# Altium PCB RGB_PCB.PcbDoc
Units mm, origin at the board's own origin, x right, y up, seen from the top; angles counter-clockwise.
Board outline 46.35 x 43.18 mm, 2 copper layers (Top Layer, Bottom Layer); 21 components, 12 nets, 104 pads, 13 vias.
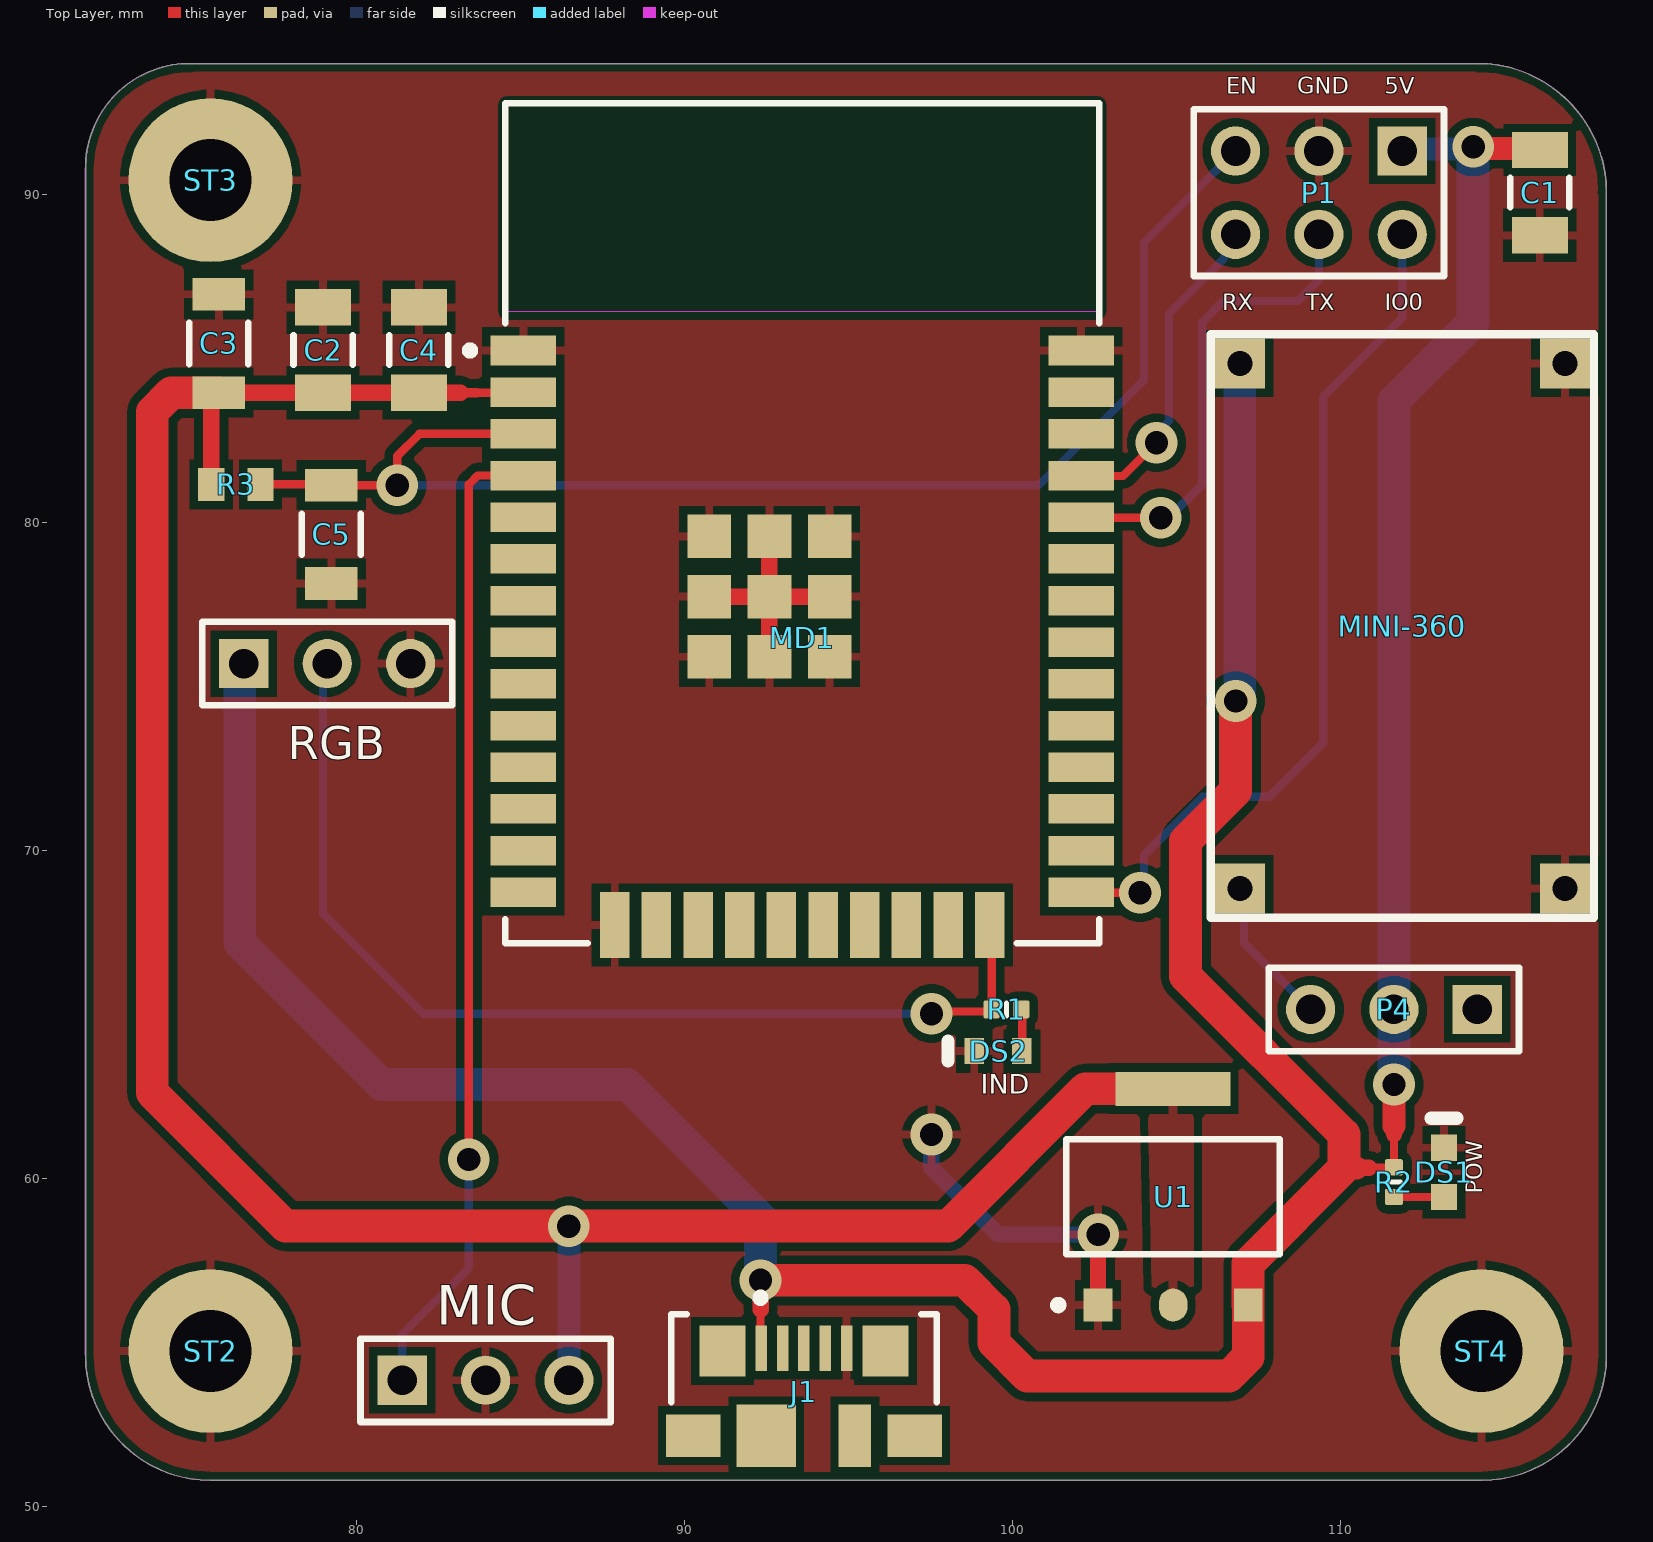
[diagram p0: Top Layer view]
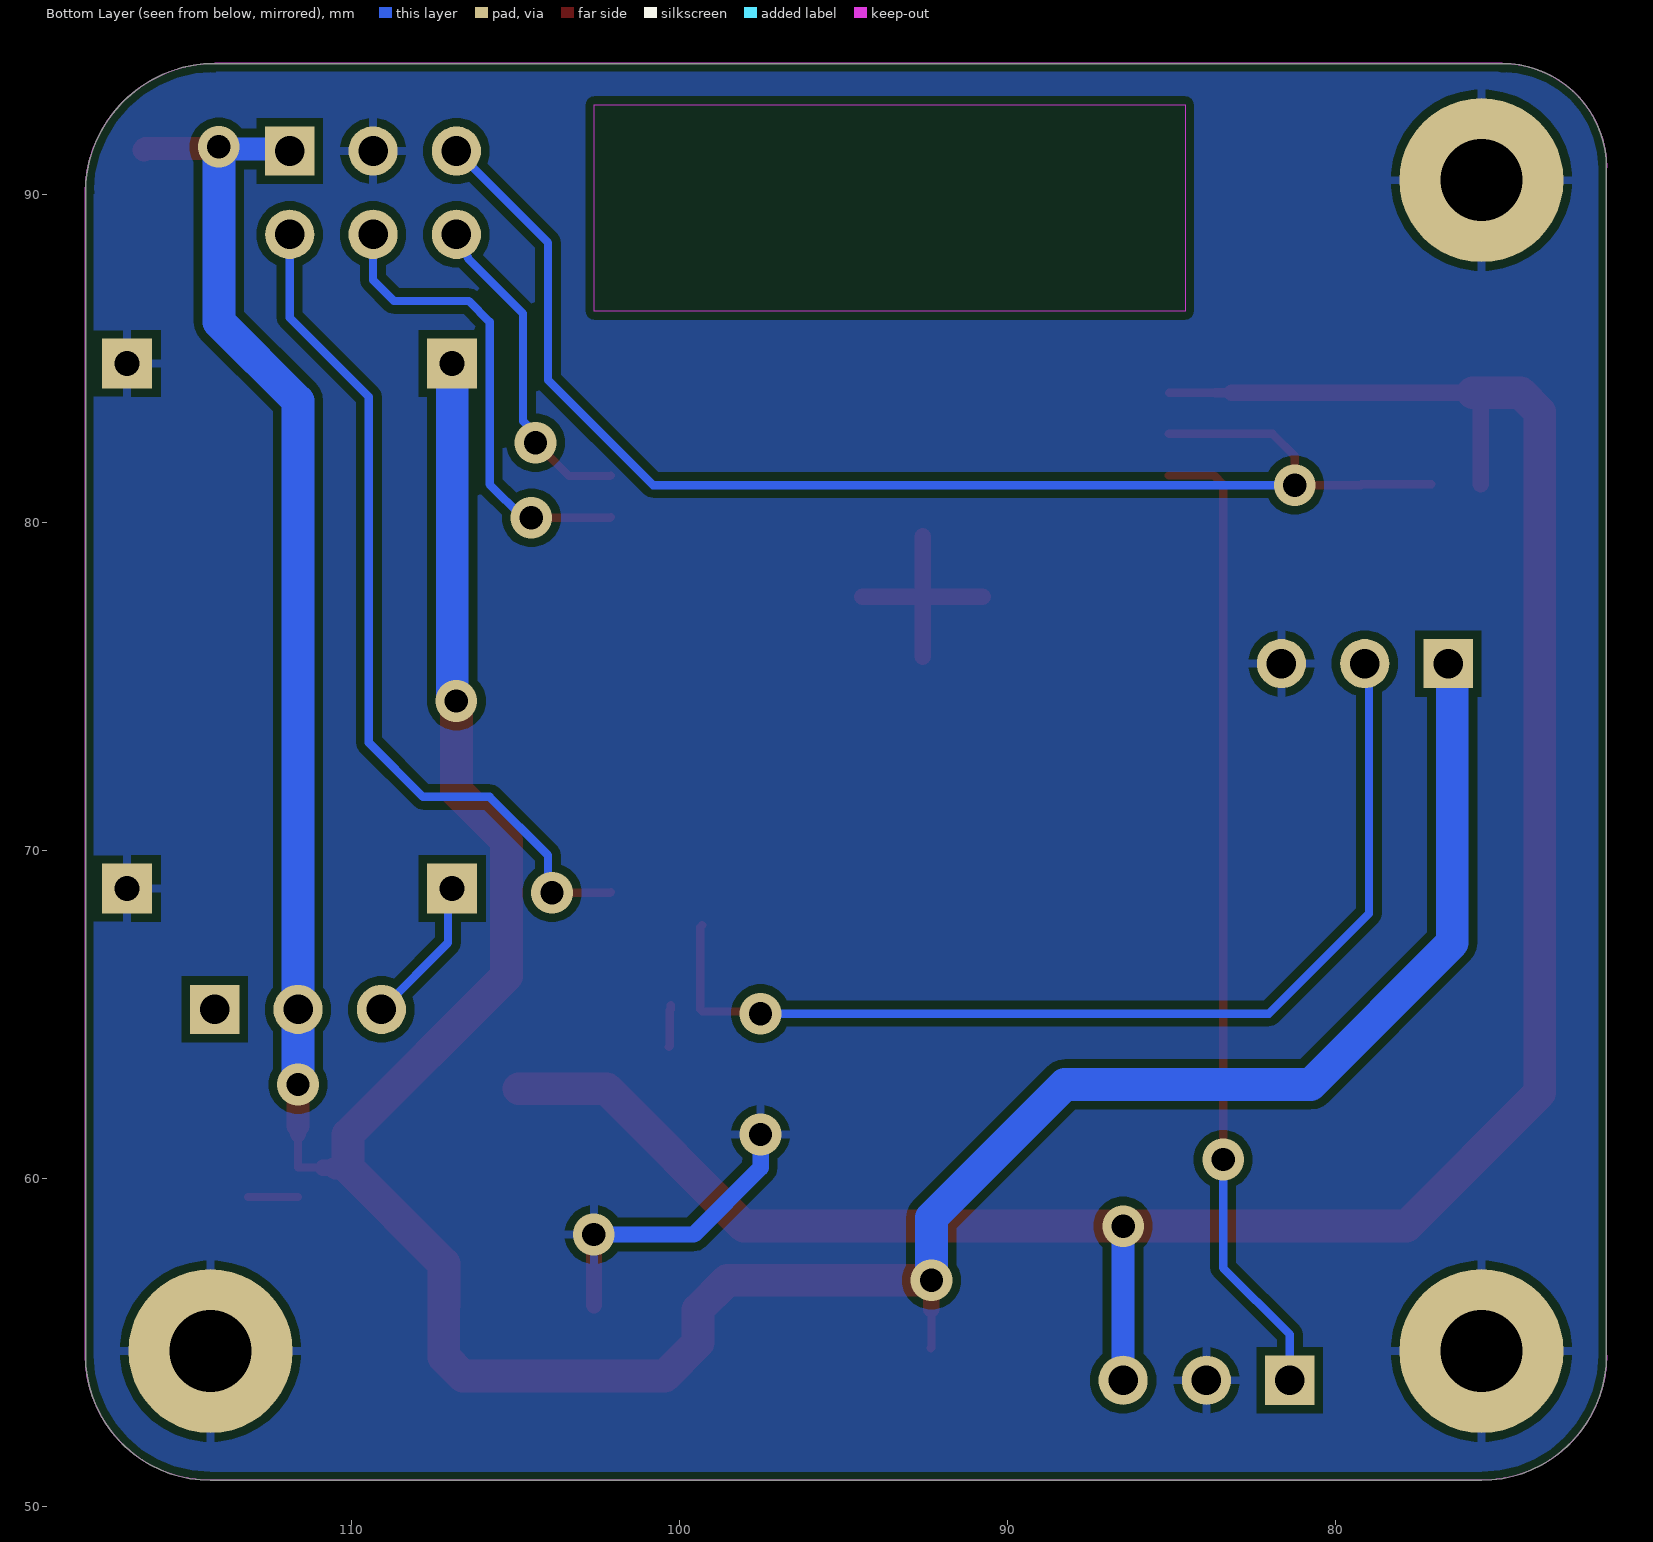
[diagram p1: Bottom Layer view, seen from below]
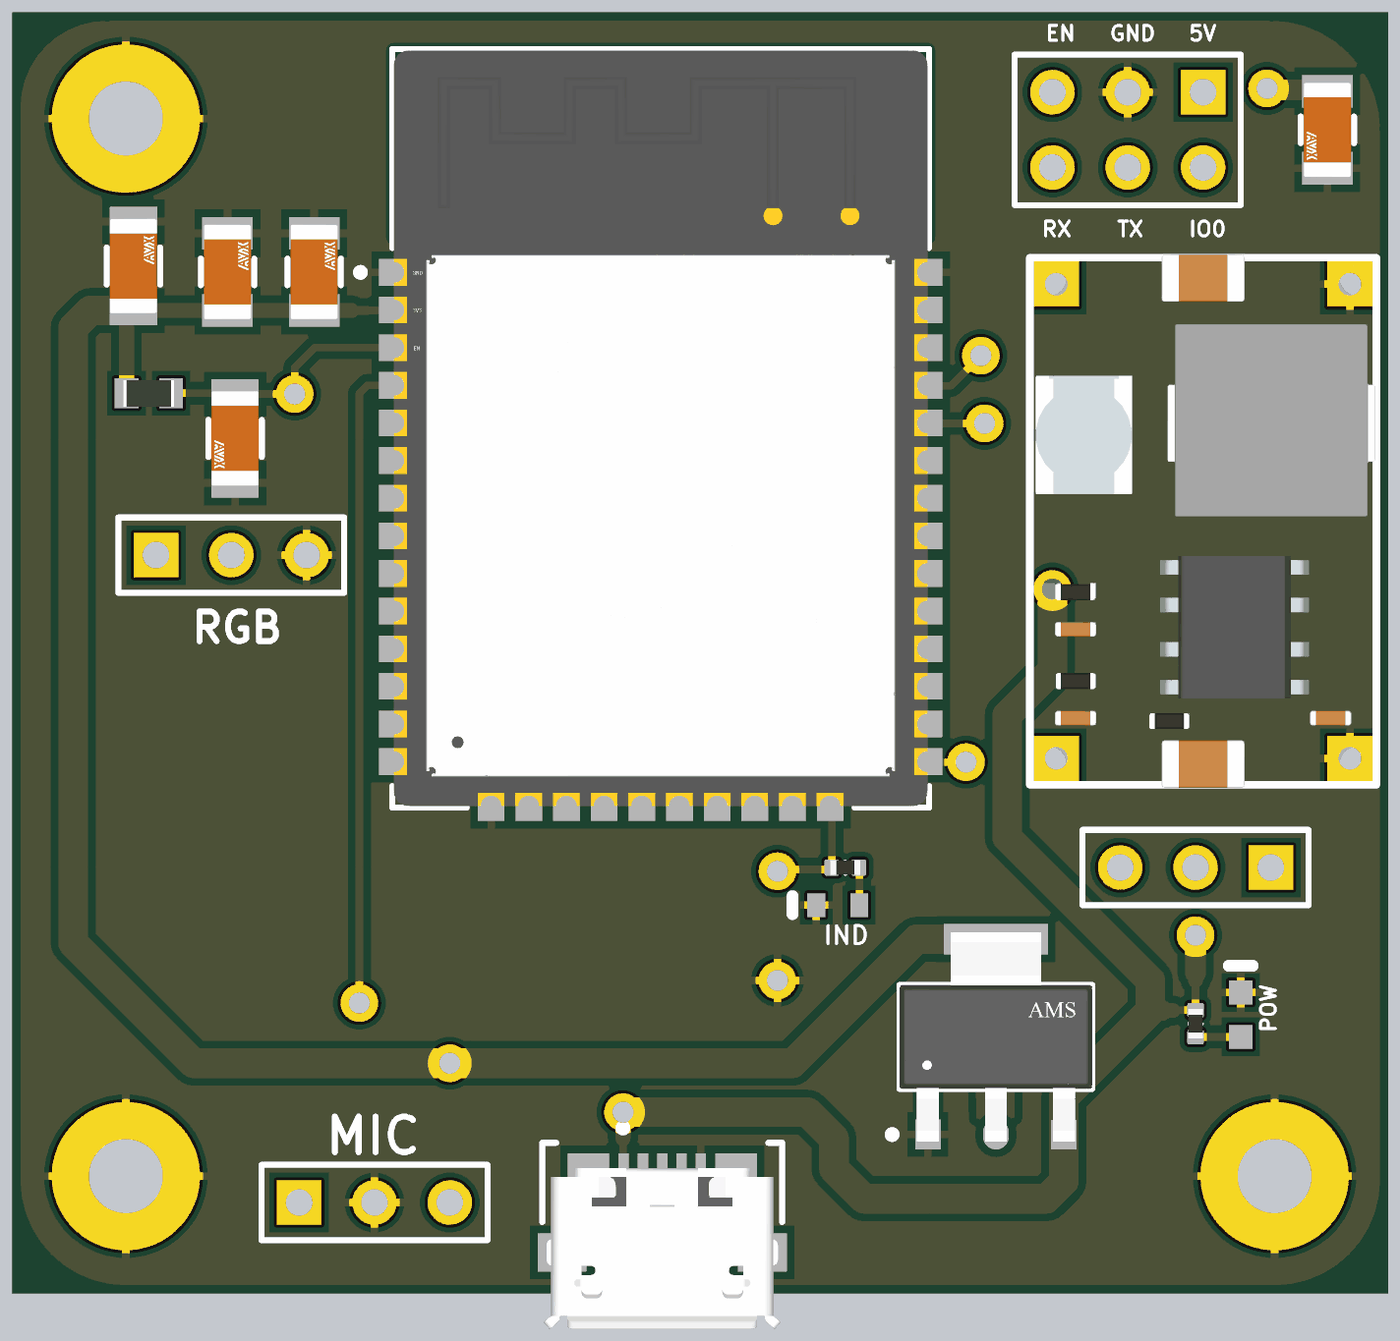
[diagram p2: 3D render of the assembled board from above, using the file's embedded part models]

## Layer stack, top to bottom
Top Solder: solder mask 0.0102, Solder Resist, Dk 3.5
Top Layer: signal copper 0.0356
Dielectric 1: dielectric 0.32, FR-4, Dk 4.8
Bottom Layer: signal copper 0.0356
Bottom Solder: solder mask 0.0102, Solder Resist, Dk 3.5

## Board outline
71.755,90.805 cw(c74.93,90.805) 74.93,93.98 114.173,93.98 cw(c114.173,90.043) 118.11,90.043 118.11,54.61 cw(c114.3,54.61) 114.3,50.8 75.565,50.8 cw(c75.565,54.61) 71.755,54.61

## Design rules (kind name [scope] priority, off if disabled: settings)
Clearance [All] p1: gap=0.254 ignorepadtopadclearanceinfootprint=FALSE except(0: Arc-Hole Track-Hole SMDPad-Hole THPad-Hole Via-Hole Fill-Hole Poly-Hole Region-Hole Text-Hole)
PolygonConnect [All] p1: connectstyle=Relief reliefconductorwidth=0.254 reliefentries=4 polygonreliefangle="90 Angle" airgapwidth=0.254
RoutingVias [All] p1: holewidth=0.711 width=1.27 viastyle="Through Hole" minholewidth=0.711 minwidth=1.27 maxholewidth=0.711 maxwidth=1.27
SolderMaskExpansion [All] p1: expansion=0.102 istentingtop=FALSE
UnRoutedNet [All] p1: checkbadconnections=TRUE
Width [All] p1: maxlimit=1 minlimit=0.254 preferedwidth=0.3 minimp=50.000000 maximp=50.000000 favimp=50.000000
29 further rules are at their usual default settings.

## Components (designator, comment, footprint, x,y, rotation, side; value= is the part's Value field where it differs from the comment)
C1 "22uF" FP-1206-L_3_2_0_2-W_1_6_0-IPC_C 116.078,90.043 r270 top
C2 "22uF" FP-1206-L_3_2_0_2-W_1_6_0-IPC_C 78.994,85.248 r90 top
C3 "100nF" FP-1206-L_3_2_0_2-W_1_6_0-MFG 75.819,85.447 r90 top
C4 "22uF" FP-1206-L_3_2_0_2-W_1_6_0-IPC_C 81.915,85.248 r90 top
C5 "100nF" FP-1206-L_3_2_0_2-W_1_6_0-MFG 79.248,79.629 r270 top
DS1 "LED RED" LTST-C191KRKT_V 113.157,60.186 r90 top
DS2 "LED BLUE" VISH-TLMX1100-2_V 99.568,63.881 r180 top
J1 "473460001" FP-473460001-MFG 93.651,52.512 r0 top
MD1 "ESP32-WROOM-32" FP-ESP32-WROOM-32-MFG 93.599,79.973 r0 top
MIC "MAX4466" HDR1X3 81.407,53.848 r0 top (schematic designator P2)
MINI-360 "MINI-360" MINI-360 110.744,73.533 r90 top
P1 "PROG. HEADER" HDR2X3_CEN 111.887,91.313 r180 top
P4 "SWITCH" HDR1X3 114.173,65.151 r180 top
R1 "Resistor 2K +/-5 % 0402 63 mW" RESC0402(1005)_L 99.822,65.151 r180 top value=2k
R2 "Resistor 2K +/-5 % 0402 63 mW" RESC0402(1005)_L 111.633,59.886 r90 top value=2k
R3 "Resistor 10k +/-1% 0603 100 mW" RESC1608X55X25ML10T15 76.339,81.153 r180 top value=10k
RGB "LIGHTS" HDR1X3 76.581,75.692 r0 top (schematic designator P3)
ST2 "PTH-M2D5X5" PTH-M2D5X5#1 75.565,54.737 r0 top
ST3 "PTH-M2D5X5" PTH-M2D5X5#2 75.692,85.344 r0 top
ST4 "PTH-M2D5X5" PTH-M2D5X5#3 113.919,54.61 r0 top
U1 "AMS1117-3.3" FP-AMS1117-IPC_C 104.902,59.436 r90 top

## Footprints (in the part's own frame and the unit in brackets; to place one, negate y for a bottom-side part, rotate by r counter-clockwise, add the part's x,y. Pads: shape width x height; smd on the part's side, far side on the other; paste and mask are expansions set on the pad)
FP-1206-L_3_2_0_2-W_1_6_0-IPC_C [mm]
  rect 1.105x1.706 smd paste+0 mask+0: 1(-1.301,0) 2(1.301,0)
  silkscreen extent -0.45,-0.9 0.45,0.9, body extent -1.95,-1 1.95,1, height 0.25
FP-1206-L_3_2_0_2-W_1_6_0-MFG [mm]
  rect 1x1.6 smd paste+0 mask+0: 1(-1.5,0) 2(1.5,0)
  silkscreen extent -0.63,-0.9 0.63,0.9, body extent -2.1,-1 2.1,1, height 0.25
FP-473460001-MFG [mm]
  rect 0.35x1.38 smd paste+0 mask+0: 1(-1.3,2.31) 2(-0.65,2.31) 3(0,2.31) 4(0.65,2.31) 5(1.3,2.31)
  rect 1.4x1.55 smd paste+0 mask+0: 6(-2.488,2.225) 7(2.488,2.225)
  rect 1.65x1.3 smd paste+0 mask+0: 8(-3.375,-0.35) 11(3.375,-0.35)
  rect 1.8x1.9 smd paste+0 mask+0: 9(-1.15,-0.35)
  rect 1x1.9 smd paste+0 mask+0: 10(1.55,-0.35)
  silkscreen extent -4.05,0.67 4.05,3.97, body extent -4.3,-2.48 4.3,3.45, height 0.25
FP-AMS1117-IPC_C [mm]
  rect 1.004x0.872 smd paste+0 mask+0: 1(-3.295,2.29)
  rrect100% 1.004x0.872 smd paste+0 mask+0: 2(-3.295,0)
  rect 1x0.872 smd paste+0 mask+0: 3(-3.295,-2.29)
  rect 1.04x3.5 smd paste+0 mask+0: ""(3.295,0)
  silkscreen extent -3.42,-3.25 1.75,3.62, body extent -3.9,-3.35 3.9,3.35, height 0.25
FP-ESP32-WROOM-32-MFG [mm]
  rect 2x0.9 smd paste+0 mask+0: 1(-8.5,5.26) 2(-8.5,3.99) 3(-8.5,2.72) 4(-8.5,1.45) 5(-8.5,0.18) 6(-8.5,-1.09) 7(-8.5,-2.36) 8(-8.5,-3.63) 9(-8.5,-4.9) 10(-8.5,-6.17) 11(-8.5,-7.44) 12(-8.5,-8.71) 13(-8.5,-9.98) 14(-8.5,-11.25) 25(8.5,-11.25) 26(8.5,-9.98) 27(8.5,-8.71) 28(8.5,-7.44) 29(8.5,-6.17) 30(8.5,-4.9) 31(8.5,-3.63) 32(8.5,-2.36) 33(8.5,-1.09) 34(8.5,0.18) 35(8.5,1.45) 36(8.5,2.72) 37(8.5,3.99) 38(8.5,5.26)
  rect 0.9x2 smd paste+0 mask+0: 15(-5.715,-12.25) 16(-4.445,-12.25) 17(-3.175,-12.25) 18(-1.905,-12.25) 19(-0.635,-12.25) 20(0.635,-12.25) 21(1.905,-12.25) 22(3.175,-12.25) 23(4.445,-12.25) 24(5.715,-12.25)
  rect 1.33x1.33 smd paste+0 mask+0: 39(-2.835,-4.075) 39(-2.835,-2.24) 39(-2.835,-0.405) 39(-1,-4.075) 39(-1,-2.24) 39(-1,-0.405) 39(0.835,-4.075) 39(0.835,-2.24) 39(0.835,-0.405)
  Keep-Out Layer region: -9,6.45 9,6.45 9,12.75 -9,12.75
  Keep-Out Layer region: -9,6.45 9,6.45 9,12.75 -9,12.75
  silkscreen extent -10.25,-12.8 9.05,12.8, body extent -9.6,-13.35 9.6,12.9, height 0.25
HDR1X3 [mm] "Connector; Header; 3 Position"
  rect 1.5x1.5 hole 0.9: 1(0,0)
  round 1.5 hole 0.9: 2(2.54,0) 3(5.08,0)
  silkscreen extent -1.27,-1.27 6.35,1.27
HDR2X3_CEN [mm] "Connector; Header; 3x2 Position"
  rect 1.5x1.5 hole 0.9: 1(0,0)
  round 1.5 hole 0.9: 2(2.54,0) 3(5.08,0) 4(0,2.54) 5(2.54,2.54) 6(5.08,2.54)
  silkscreen extent -1.27,-1.27 6.35,3.81
LTST-C191KRKT_V [mm] "SMD, 2-Leads, Body 1.6x0.8mm"
  rect 0.8x0.8 smd: 1(-0.75,0) 2(0.75,0)
  silkscreen extent 1.65,-0.4 1.65,0.4, body extent -0.8,-0.4 0.8,0.4, height 0.9
MINI-360 [mil]
  rect 60x60 hole 30: 1(-185,150) 2(445,150) 3(-185,-240) 4(445,-240)
  silkscreen extent -220,-275 480,185, body extent -224,-281 485,191, height 88
PTH-M2D5X5#1 [mm]
  round 5 hole 2.5: 1(0,0)
PTH-M2D5X5#2 [mm]
  round 5 hole 2.5: 1(-0.127,5.08)
PTH-M2D5X5#3 [mm]
  round 5 hole 2.5: 1(0.381,0.127)
RESC0402(1005)_L [mm] "Chip Resistor, Body 1.0x0.5mm, IPC High Density"
  rrect25% 0.5x0.55 smd: 1(-0.45,0) 2(0.45,0)
  silkscreen extent 0,-0.2 0,0.2, body extent -0.5,-0.25 0.5,0.25, height 0.3
RESC1608X55X25ML10T15 [mm] "Chip Resistor, 2-Leads, Body 1.70x0.90mm, IPC Low Density"
  rect 0.8x1 smd: 1(-0.75,0) 2(0.75,0)
  body extent -0.85,-0.45 0.85,0.45, height 0.55
VISH-TLMX1100-2_V [mm] "SMD, 2-Leads, Body 1.6x0.8mm"
  rect 0.6x0.8 smd: 1(-0.725,0) 2(0.725,0)
  silkscreen extent 1.53,-0.3 1.53,0.3, body extent -0.8,-0.4 0.8,0.4, height 0.65

## Part data
C1 C2 C4: library part CMP-1037-04992-2, "General Purpose Ceramic Capacitor, 1206, 22uF, 10%, X5R, 15%, 16V", Case Code (Imperial)=1206, Case Code (Metric)=3216, Dielectric=X5R, Max Operating Temperature=85°C, Min Operating Temperature=-55°C, Package Quantity=1, Tolerance=10%, Voltage Rating=16V, Capacitance=22uF, Case/Package=1206, Construction=Flat, Contact Plating=Tin, Depth=1.6mm, Height=0.07mm, Lead Free="Lead Free", Length=3.2mm, Mount="Surface Mount", Number of Pins=2, Packaging="Tape and Reel", Radiation Hardening=No, REACH SVHC="No SVHC", RoHS Compliant=Yes, Series=-, Termination=SMD/SMT, Thickness=0.07inch, Voltage Rating (DC)=16V, Width=0.063inch
C3 C5: library part CMP-2000-05018-2, "General Purpose Ceramic Capacitor, 1206, 100nF, 10%, X7R, 15%, 50V", Case Code (Imperial)=1206, Case Code (Metric)=3216, Dielectric=X7R, Dielectric Material=Ceramic, Insulation Resistance=100GR, Max Operating Temperature=125°C, Min Operating Temperature=-55°C, Package Quantity=1, Tolerance=10%, Voltage=50V, Capacitance=100nF, Case/Package=1206, Construction=Flat, Contact Plating=Tin, Depth=1.6mm, Dissipation Factor=2.5%, Height=0.94mm, Lead Free="Lead Free", Length=3.2mm, Mount="Surface Mount", Number of Pins=2, Packaging="Tape and Reel", Radiation Hardening=No, REACH SVHC="No SVHC", RoHS Compliant=Yes, Series=-, Termination=SMD/SMT, Thickness=0.037inch, Voltage Rating=50V, Voltage Rating (DC)=50V, Width=1.6mm
DS1: library part CMP-007-00024-2, "LED Uni-Color Red, 62.5 mW, 25 mA, -30 to 85 degC, 2-Pin SMD, RoHS, Tape and Reel", Case/Package=0603, Colour=Red, Forward Current=20mA, Forward Voltage=2V, Manufacturer=Lite-On, Max Operating Temperature=85°C, Min Operating Temperature=-55°C, Package Description="2-Pin Surface Mount Device, Body 1.6 x 0.8 mm", Package Quantity=3000, Package Reference=C191KRKT, Power=75mW, Datasheet URL=http://optoelectronics.liteon.com/upload/download/DS-22-99-0151/S_110_LTST-C190KRKT.pdf, Datasheet Version="Rev. F, 05/2013", Illumination Colour=Red, Lens Style=Diffused, Luminous Intensity=54mcd, Manufacturer URL=http://www.us.liteon.com/, Mounting Technology=SM, Nominal Vf=2V, Packaging=TapeandReel, Pins=2, RoHS Compliant=True, Viewing Angle=130degrees
DS2: library part CMP-007-00028-2, "Blue LED, 10 mA, 3.9 V, -40 to 100 degC, 2-Pin SMD (0603), RoHS, Tape and Reel", Case/Package=0603, Colour=Blue, Forward Current=10mA, Forward Voltage=3.9V, Manufacturer="Vishay Semiconductor", Max Operating Temperature=100°C, Min Operating Temperature=-40°C, Package Description="2-Pin Surface Mount Device, Body 1.6 x 0.8 mm", Package Quantity=3000, Power=68mW, Datasheet URL=http://download.siliconexpert.com/pdfs/2016/8/7/12/43/26/667/vsh_/manual/379263299541529tlmb1100.pdf, Datasheet Version="Rev. 2.7, 03/2016", Illumination Colour=Blue, Lens Style=Diffused, Luminous Intensity=5mcd, Manufacturer URL=http://www.vishay.com/, Mounting Technology=SM, Nominal Vf=3.9V, Package Reference=0603, Packaging=TapeandReel, Pins=2, RoHS Compliant=True, Viewing Angle=160degrees
J1: library part CMP-2000-05246-2, "CONN RCPT USB2.0 MICRO B SMD R/A", Current Rating=1.8A, Manufacturer=Molex, Package=0, Temperature="-30°C to +85°C", Temperature Range High=+85°C, Temperature Range Low=-30°C, Voltage Rating=30V, Automotive=No, Category=Conn, ComponentLink2Description=Datasheet, ComponentLink2URL=https://www.molex.com/webdocs/datasheets/pdf/en-us/0473460001_IO_CONNECTORS.pdf, Conn Orientation="Right Angle", Contact Material=Gold,Nickel, Device Class L1=Connectors, Device Class L2="USB Connectors", Device Class L3=unset, Digikey Description="CONN RCPT USB2.0 MICRO B SMD R/A", Footprint Url=https://www.molex.com/pdm_docs/sd/473460001_sd.pdf, Height=2.945mm, Is Female=yes, Lead Free=Yes, Manufacturer Part Number=473460001, Number Of Contacts=5, Octopart=https://octopart.com/47346-0001-molex-7164928, Pitch=0.65mm, RoHS=TRUE, Shielding=true, Usb Standard="USB 2.0"
MD1: library part CMP-194065-000008-1, "RX TXRX MOD WIFI SURFACE MOUNT", Case/Package=SMD/SMT, Frequency=2.5GHz, Max Operating Temperature=85°C, Min Operating Temperature=-40°C, Operating Supply Voltage=3.6V, Package Quantity=550, Data Rate=150Mbps, Mount="Surface Mount", Packaging="Cut Tape", Sensitivity=-98dBm, Weight=0.088185oz
MIC P4 RGB: library part "Header 3", "Header, 3-Pin", LatestRevisionDate=17-Jul-2002, LatestRevisionNote="Re-released for DXP Platform.", Publisher="Altium Limited"
MINI-360: library part CMP-004-000006-1, Design Item ID=MINI-360, Source=MINI-360.SchLib
P1: library part "Header 3X2A", "Header, 3-Pin, Dual row", LatestRevisionDate=17-Jul-2002, LatestRevisionNote="Re-released for DXP Platform.", Publisher="Altium Limited"
R1 R2: library part CMP-009-00138-3, "Chip Resistor, 2 kOhms, +/-5 %, 63 mW, -55 to 155 degC, 0402", Case/Package=0402, Max Operating Temperature=155°C, Min Operating Temperature=-55°C, Power=63mW, Tolerance=5%, Pins=2
R3: library part CMP-009-00017-5, "Chip Resistor, 10 KOhm, +/- 1%, 01 W, -55 to 155 degC, 0603 (1608 Metric)", Case/Package=0603, Max Operating Temperature=155°C, Min Operating Temperature=-55°C, Power=100mW, Tolerance=1%, Voltage Rating=50V, Mounting Technology=SM, Pins=2, RoHS Compliant=True
ST2 ST3 ST4: library part CMP-00028-00004-2, "M2 PTH (2.5mm), 5mm pad", Pins=1
U1: library part CMP-209535-000001-1, "LDO Voltage Regulators 1A, 3.3V", Dropout Voltage=1.1V, Manufacturer="Advanced Monolithic Systems", Max Junction Temp=+125°C, Max Power Dissipation=1.2W, Max Supply Voltage=15V, Nominal Supply Current=5mA, Output Current=1A, Output Voltage=3.3V, Package=AMS1117, Temperature="-40°C to +125°C", Temperature Range Low=-40°C, Automotive=No, Category=IC, ComponentLink2Description=Datasheet, ComponentLink2URL=http://www.advanced-monolithic.com/pdf/ds1117.pdf, Device Class L1="Integrated Circuits (ICs)", Device Class L2="Power Management ICs", Device Class L3="Voltage Regulators - Linear", Height=1.8mm, Ipc Land Pattern Name=SOT229P700X180-4, Lead Free=Yes, Manufacturer Part Number=AMS1117-3.3, Number Of Outputs=1, Octopart=https://octopart.com/ams1117-3.3-advanced+monolithic+systems-25899300, Output Type=Fixed, RoHS=TRUE, Standoff Height=0.64mm, Temperature Range High=+125°C

## Via types
v1: diameter 1.27, hole 0.711, Top Layer to Bottom Layer, 13 vias

## Nets (pads, with @x,y where several pads share a name; then routed paths per layer and width w, separated by ;. In a path a pad name is that pad's centre, name@x,y a point inside that pad or via, vN(x,y) a via of type N, cw(c..) or ccw(c..) an arc to the next point about the centre after c; other vN are vias at no path point)
3V3: C2.1 C3.1 C4.1 MD1.2 MIC.3 R3.2 U1. U1.2 | length 74.4
  Top Layer w0.254: 83.693,83.947 MD1.2@85.083,83.947
  Top Layer w0.3: 83.185,83.947 83.693,83.947
  Top Layer w0.5: R3.2 75.589,83.717 C3.1 C2.1 C4.1 83.185,83.947
  Top Layer w1: C3.1 74.373,83.947 73.787,83.361 73.787,62.611 77.851,58.547 v1(86.487,58.547) 98.044,58.547 102.228,62.731 U1.
  Bottom Layer w0.7: MIC.3 v1(86.487,58.547)
+5: C1.1 J1.1 MINI-360.2 P1.1 P4.2 R2.2 RGB.1 U1.3 | length 121.1
  Top Layer w0.254: 92.329,56.007 92.329,54.845 J1.1 ; 110.871,60.325 110.882,60.336 R2.2 111.633,61.341
  Top Layer w0.5: 92.329,56.007 v1@92.329,56.642 ; 110.49,60.325 110.871,60.325 ; 111.633,61.341 111.633,61.595
  Top Layer w0.7: v1@92.329,56.642 v1(92.329,56.896) ; 110.109,60.325 110.49,60.325 ; 111.633,61.595 v1(111.633,62.865) ; v1(114.046,91.44) 114.094,91.392 116.284,91.392 C1.1@116.332,91.344
  Top Layer w1: v1(92.329,56.896) 98.552,56.896 99.441,56.007 99.441,54.991 100.457,53.975 106.606,53.975 107.192,54.561 U1.3 ; v1(106.807,74.549) 106.807,71.812 105.283,70.288 105.283,66.167 110.109,61.341 110.109,60.325 107.188,57.404 U1.3@107.188,56.141
  Bottom Layer w0.7: P1.1 111.95,91.376 113.983,91.376 v1(114.046,91.44)
  Bottom Layer w1: RGB.1 76.454,75.565 76.454,67.183 80.772,62.865 88.265,62.865 92.329,58.801 v1(92.329,56.896) ; v1(106.807,74.549) 106.807,74.622 106.934,74.749 MINI-360.2 ; v1(111.633,62.865) P4.2 111.633,83.693 114.046,86.106 v1(114.046,91.44)
EN: C5.1 MD1.3 P1.3 R3.1 | length 41.4
  Top Layer w0.254: R3.1 79.224,81.153 C5.1 v1(81.256,81.129) 81.256,82.018 81.931,82.693 MD1.3
  Bottom Layer w0.254: v1(81.256,81.129) 100.814,81.129 104.013,84.328 104.013,88.519 P1.3
GND: C1.2 C2.2 C3.2 C4.2 C5.2 DS1.2 DS2.2 J1.5 MD1.1 MD1.15 MD1.38 MD1.39 MIC.2 MINI-360.3 MINI-360.4 P1.2 RGB.3 ST2.1 ST3.1 ST4.1 U1.1 | length 16.4
  Top Layer w0.5: MD1.39@90.764,77.733 MD1.39@92.599,77.733 ; MD1.39@92.599,75.898 MD1.39@92.599,77.733 ; MD1.39@92.599,79.568 MD1.39@92.599,77.733 ; MD1.39@94.434,77.733 MD1.39@92.599,77.733 ; U1.1 102.612,58.035 102.616,58.039 v1(102.616,58.293)
  Bottom Layer w0.5: v1(97.536,61.341) 97.536,60.325 99.568,58.293 v1(102.616,58.293)
IO0: MD1.25 P1.4 | length 26.4
  Top Layer w0.254: MD1.25 102.115,68.707 v1(103.894,68.707)
  Bottom Layer w0.254: v1(103.894,68.707) 104.013,68.826 104.013,69.85 105.791,71.628 107.823,71.628 109.474,73.279 109.474,83.82 111.887,86.233 P1.4
IO2: MD1.24 R1.2 RGB.2 | length 32
  Top Layer w0.254: v1(97.536,65.024) 97.599,65.087 99.309,65.087 R1.2 99.372,67.665 MD1.24
  Bottom Layer w0.254: RGB.2 78.994,75.565 78.994,68.072 82.042,65.024 v1(97.536,65.024)
NetDS1_1: DS1.1 R2.1 | length 1.5
  Top Layer w0.254: R2.1 DS1.1
NetDS2_1: DS2.1 R1.1 | length 1.3
  Top Layer w0.254: R1.1@100.272,65.278 R1.1 100.301,65.122 100.301,64.037 DS2.1@100.33,64.008
NetMINI-360_3: MINI-360.1 P4.3 | length 4.5
  Bottom Layer w0.254: MINI-360.1@107.061,68.834 107.061,67.183 P4.3
RX: MD1.35 P1.6 | length 10.1
  Top Layer w0.254: MD1.35 102.115,81.407 103.378,81.407 v1(104.394,82.423)
  Bottom Layer w0.254: v1(104.394,82.423) 104.394,82.698 104.775,83.079 104.775,86.36 106.452,88.037 106.452,88.081 106.807,88.436 P1.6
TX: MD1.34 P1.5 | length 14.6
  Top Layer w0.254: MD1.34 102.115,80.137 v1(104.521,80.137)
  Bottom Layer w0.254: v1(104.521,80.137) 104.775,80.137 105.791,81.153 105.791,86.106 106.426,86.741 108.712,86.741 109.347,87.376 P1.5
VP: MD1.4 MIC.1 | length 29.9
  Top Layer w0.254: v1(83.439,60.579) 83.439,81.153 83.709,81.423 MD1.4
  Bottom Layer w0.254: MIC.1 81.407,55.245 83.439,57.277 v1(83.439,60.579)
pads on no net: J1.2 J1.3 J1.4 J1.6 J1.7 J1.8 J1.9 J1.10 J1.11 MD1.5 MD1.6 MD1.7 MD1.8 MD1.9 MD1.10 MD1.11 MD1.12 MD1.13 MD1.14 MD1.16 MD1.17 MD1.18 MD1.19 MD1.20 MD1.21 MD1.22 MD1.23 MD1.26 MD1.27 MD1.28 MD1.29 MD1.30 MD1.31 MD1.32 MD1.33 MD1.36 MD1.37 P4.1

## Polygon pours and split planes (outlines as drawn)
GND on Top Layer "NONET_L-01_P-001" (solid, pour order 15): 74.712,93.98 ccw(c74.712,91.44) 72.916,93.236 72.263,92.583 ccw(c73.489,91.357) 71.755,91.357 71.755,54.138 ccw(c74.295,54.138) 72.499,52.342 73.533,51.308 ccw(c74.453,52.228) 74.453,50.927 113.993,50.927 cw(c113.993,50.493) 114.3,50.8 114.772,50.8 ccw(c114.772,53.34) 116.568,51.544 117.366,52.342 ccw(c115.57,54.138) 118.11,54.138 118.11,90.515 ccw(c115.57,90.515) 117.366,92.311 116.441,93.236 ccw(c114.645,91.44) 114.645,93.98 114.173,93.98
3V3 on Top Layer "NONET_L-01_P-001" (solid, pour order 0): 104.267,55.626 105.537,55.626 105.537,61.849 106.934,61.849 106.934,63.373 102.616,63.373 102.616,61.849 104.14,61.849
GND on Bottom Layer "NONET_L-01_P-001" (solid, pour order 13): 74.712,93.98 ccw(c74.712,91.44) 72.916,93.236 72.263,92.583 ccw(c73.489,91.357) 71.755,91.357 71.755,54.138 ccw(c74.295,54.138) 72.499,52.342 73.297,51.544 ccw(c75.093,53.34) 75.093,50.8 114.772,50.8 ccw(c114.772,53.34) 116.568,51.544 117.366,52.342 ccw(c115.57,54.138) 118.11,54.138 118.11,90.515 ccw(c115.57,90.515) 117.366,92.311 116.31,93.367 ccw(c114.83,91.886) 114.83,93.98 107.95,93.98

## Keep-outs
Keep-Out Layer:
  lines w0.001: 71.754,90.805 cw(c74.93,90.805) 74.93,93.981 ; 71.754,90.805 71.754,90.805 ; 71.754,90.805 71.754,54.61 ccw(c75.565,54.61) 75.565,50.799 114.3,50.799 ccw(c114.3,54.61) 118.111,54.61 118.111,90.043 ; 74.93,93.981 ccw(c74.93,93.98) 74.93,93.981 ; 74.93,93.981 ccw(c74.93,93.98) 74.93,93.981 ; 74.93,93.981 114.173,93.981 ; 114.173,93.981 cw(c114.173,90.043) 118.111,90.043 ; 114.173,93.981 ccw(c114.173,93.98) 114.173,93.981 ; 118.111,90.043 ccw(c118.11,90.043) 118.111,90.043

## Silkscreen, mask and mechanical layers (free items; w line width, h text height)
Top Overlay:
  text "EN" at 106.526,93.064 h0.5
  text "GND" at 108.685,93.064 h0.5
  text "5V" at 111.352,93.064 h0.5
  text "RX" at 106.399,86.46 h0.5
  text "TX" at 108.939,86.46 h0.5
  text "IO0" at 111.352,86.46 h0.5
  text "IND" at 99.033,62.584 h0.6
  text "POW" at 114.327,59.536 h0.5 r90
Mechanical 1:
  lines w0.254: 71.755,54.61 ccw(c75.565,54.61) 75.565,50.8 87.884,50.8 114.3,50.8 ccw(c114.3,54.61) 118.11,54.61 118.11,90.043 ccw(c114.173,90.043) 114.173,93.98 79.883,93.98 74.93,93.98 ccw(c74.93,90.805) 71.755,90.805 71.755,87.63 71.755,58.42 71.755,54.61

## Text inside footprints (layer, text, board x,y; h text height)
MINI-360: Mechanical 1 "OUT-" at 107.442,79.883 h1 r90; Mechanical 1 "OUT+" at 117.221,80.01 h1 r90; Mechanical 1 "IN-" at 107.569,70.104 h1 r90; Mechanical 1 "IN+" at 117.221,70.104 h1 r90